# EAGLE board AND GATE (EAGLE 6.5.0)
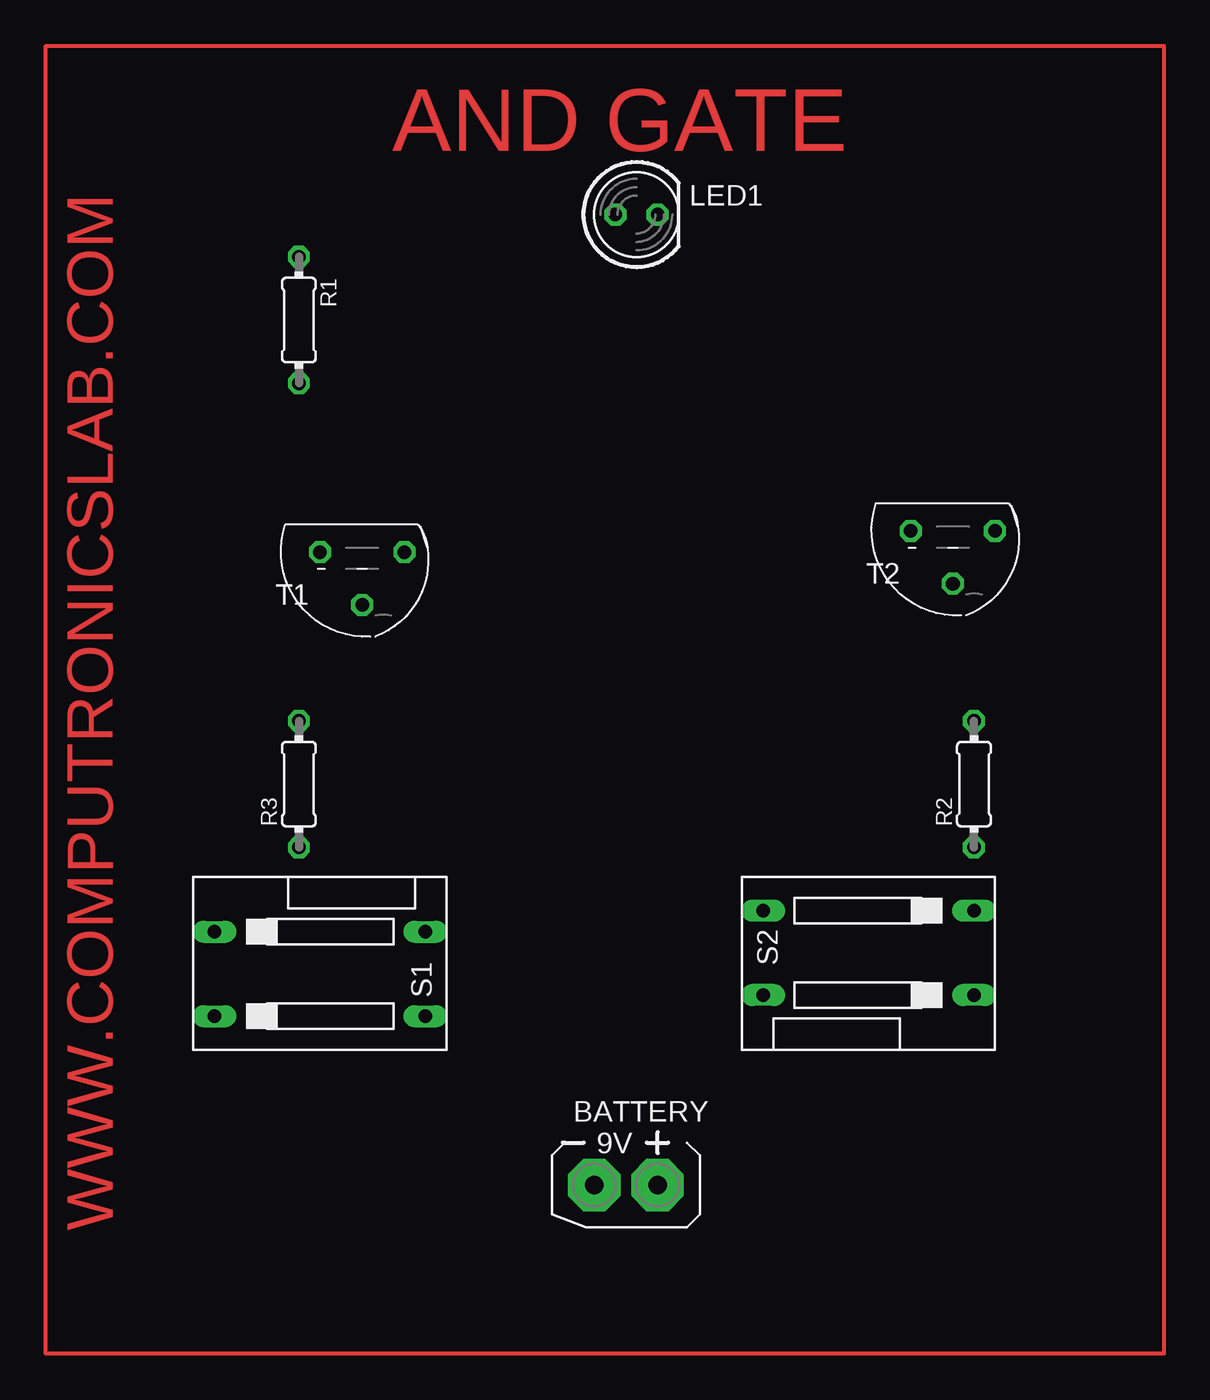
[diagram p0: board, top side]
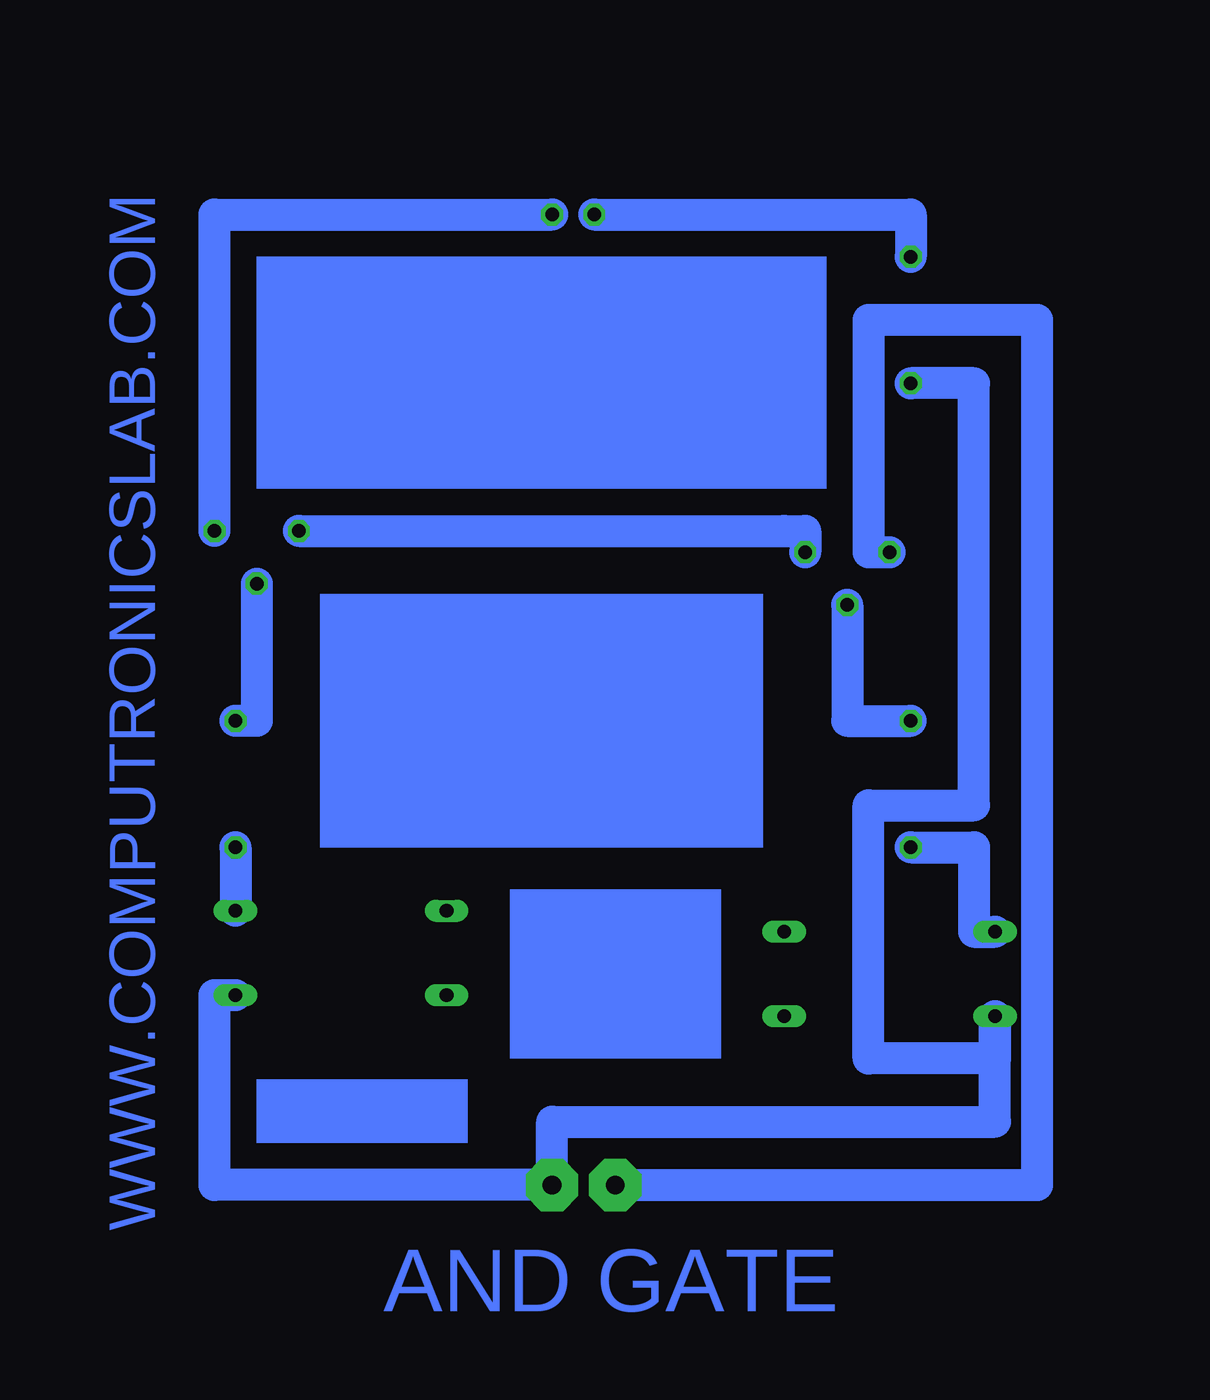
[diagram p1: board, bottom side, seen from below]

No outline drawn. Coordinates in mm, seen from the top.
Copper layers (1*16): Top 0.035mm / dielectric 1.5mm / Bottom 0.035mm
Design rules "default": minimum track width 10mil, minimum drill 24mil, track to track 8mil, track to pad 8mil, pad to pad 8mil, via to via 8mil, smd to smd 8mil, copper to edge 40mil, drill to drill 8mil, minimum pad ring 10mil, minimum via ring 8mil, stop-mask expansion 4mil, vias tented up to drill 0mil, thermal gap 10mil

## Footprints (pad centres in the part's own frame; a part is rotated, then mirrored left to right if it is on the bottom)
AB9V = drill 1.118 pad 3.15 octagon: + 0,2.54; - 0,-1.27
LED5MM = drill 0.813 octagon: A -1.27,0; K 1.27,0
0204/7 = drill 0.813 octagon: 1 -3.81,0; 2 3.81,0
DS-02 = drill 0.813 long: 1 -5.08,-6.35; 2 0,-6.35; 3 0,6.35; 4 -5.08,6.35
TO92 = drill 0.813 octagon: 1 2.54,-1.27; 2 0,1.905; 3 -2.54,-1.27

## Placement (x,y rotation side)
BATTERY  9V  [AB9V]  34.29,3.81 270 top
LED1  5MM  [LED5MM]  35.56,62.23 0 top
R1  220E  [0204/7]  15.24,55.88 270 top
R2  10K  [0204/7]  55.88,27.94 90 top
R3  10K  [0204/7]  15.24,27.94 90 top
S1  PUSH SWITCH  [DS-02]  16.51,13.97 270 top
S2  PUSH SWITCH  [DS-02]  49.53,20.32 90 top
T1  BC547  [TO92]  19.05,40.64 180 top
T2  BC547  [TO92]  54.61,41.91 180 top

## Library data of the parts
BATTERY = battery
LED1 = led
R1-R3 = eagle-ltspice; SPICEMODEL: NONE; SPICEPREFIX: R
S1 S2 = switch-dil; OC_FARNELL: 9472126; OC_NEWARK: unknown
T1 T2 = transistor

## Nets
N$1: T1.3 T2.1
N$2: R2.2 T2.2
N$3: R3.2 T1.2
N$4: LED1.K T2.3
N$5: LED1.A R1.1
N$6: R2.1 S2.2
N$7: R3.1 S1.1
N$8: BATTERY.+ R1.2 S1.2 S2.1
N$10: BATTERY.- T1.1

## Tracks (layer width: path | path; a pad name or v marks a point on that pad's centre or on a via)
N$1
  Bottom 1.93: T1.3 21.59,43.18 22.86,43.18 T2.1
N$2
  Bottom 1.93: T2.2 54.61,31.75 R2.2
N$3
  Bottom 1.93: T1.2 19.05,31.75 R3.2
N$4
  Bottom 1.93: T2.3 57.15,62.23 LED1.K
N$5
  Bottom 1.93: R1.1 15.24,62.23 LED1.A
N$6
  Bottom 1.93: R2.1 S2.2
N$7
  Bottom 1.93: R3.1 11.43,24.13 11.43,19.05 S1.1
N$8
  Bottom 1.93: R1.2 11.43,52.07 11.43,26.67 17.78,26.67 17.78,11.43 10.16,11.43 S1.2 10.16,7.62 36.83,7.62 BATTERY.+ 57.15,3.81 57.15,15.24 S2.1
N$9
  Top 0.254: 0,72.39 67.31,72.39 67.31,-6.35 0,-6.35 0,72.39
N$10
  Bottom 1.93: T1.1 17.78,41.91 17.78,55.88 7.62,55.88 7.62,5.08 7.62,3.81 BATTERY.-
(copper drawn outside any net)
  shapes: Bottom area x4

## Text on the board
Top: AND GATE | WWW.COMPUTRONICSLAB.COM
Bottom: WWW.COMPUTRONICSLAB.COM | AND GATE